# Altium PCB EVAL-AD7124.PcbDoc (part 2 of 2)
Units mil, origin at the board's own origin, x right, y up, seen from the top; angles counter-clockwise.
Board outline 2362.21 x 1574.8 mil, 4 copper layers (Top Layer, GND Layer, PWR Layer, Bottom Layer), stack 30.635 mil thick; 93 components, 57 nets, 234 pads, 171 vias.
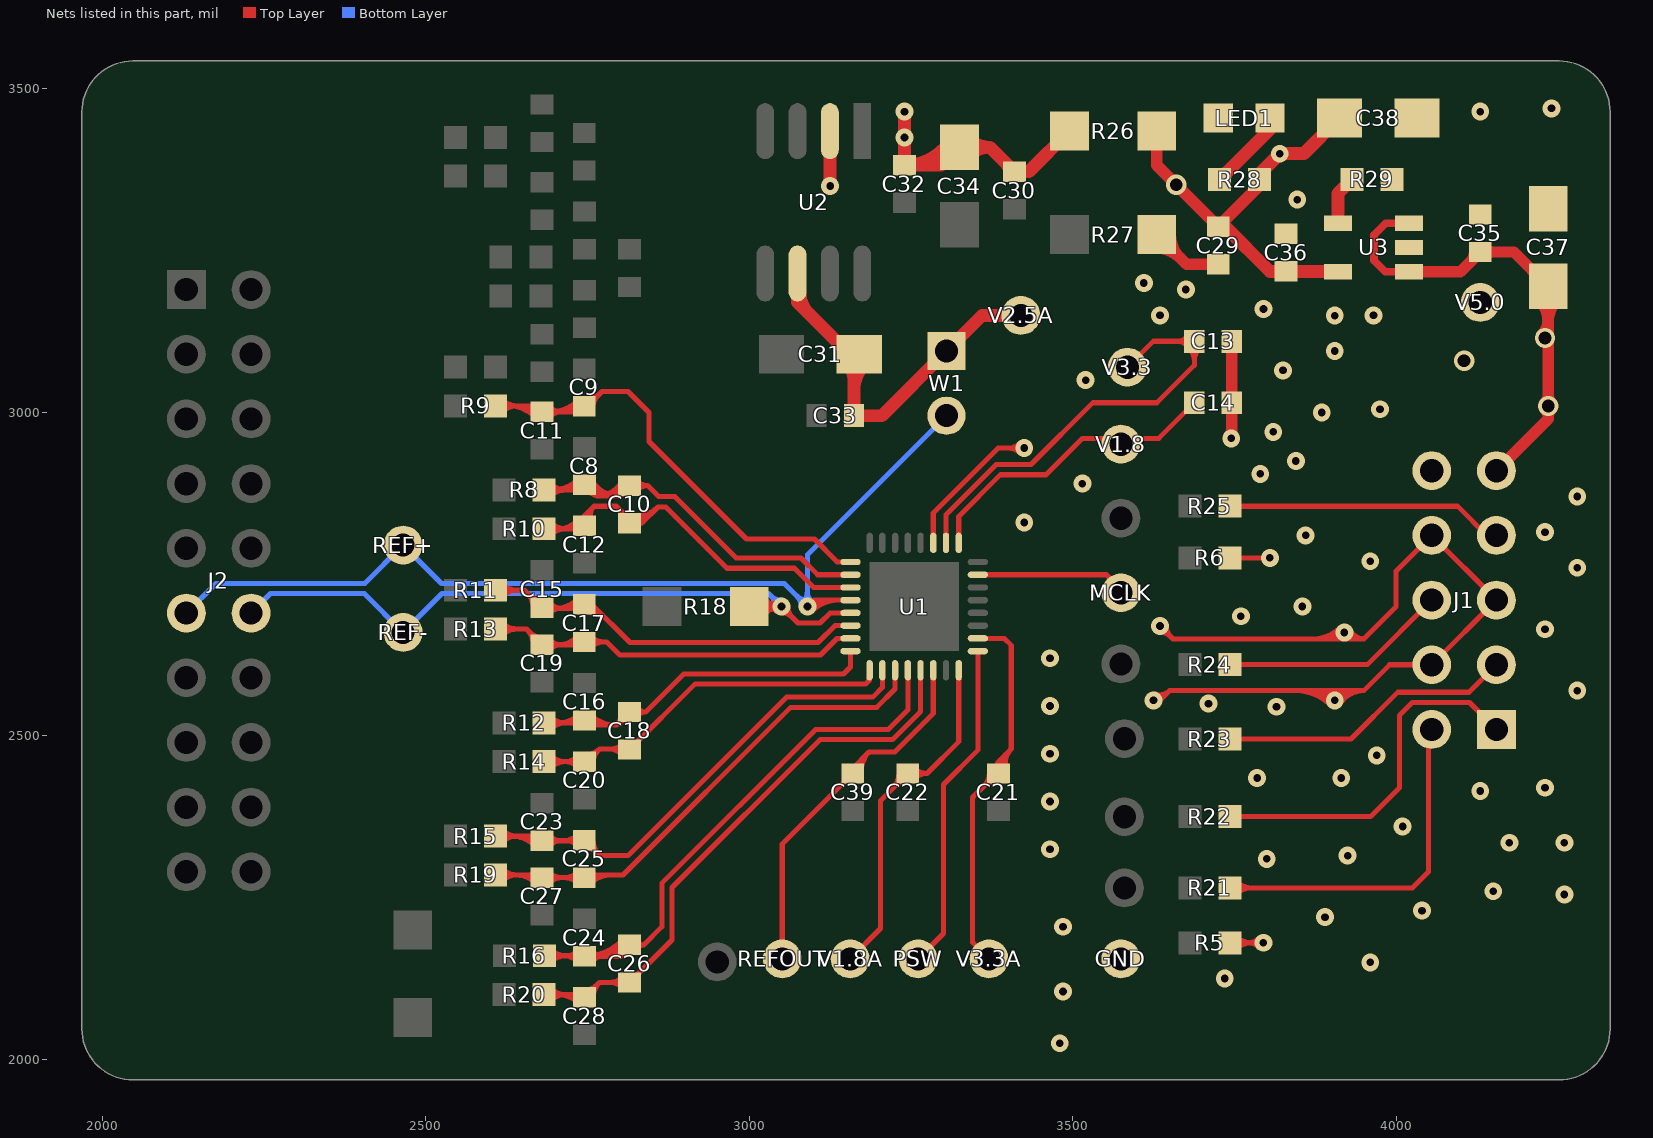
[diagram p4: the nets of this part, all layers, seen from the top]

## Via types
v1: diameter 27.56, hole 11.81, Top Layer to Bottom Layer, 158 vias
v2: diameter 19.68, hole 7.87, Top Layer to Bottom Layer, 9 vias
v3: diameter 31.5, hole 19.68, Top Layer to Bottom Layer, 4 vias

## Nets (pads, with @x,y where several pads share a name; then routed paths per layer and width w, separated by ;. In a path a pad name is that pad's centre, name@x,y a point inside that pad or via, vN(x,y) a via of type N, cw(c..) or ccw(c..) an arc to the next point about the centre after c; other vN are vias at no path point) (continued)
AIN5: C9.1 C11.1 R9.1 U1.9 | length 1015.1
  Top Layer w7.87: R9.1@2608.65,3010.24 2670.76,3010.24 C11.1@2680,3001 2732,3001 2740,3009 2749,3009 2772.5,3032.5 2812.5,3032.5 2845,3000 2845,2955 2995.75,2804.25 3100.75,2804.25 3136.1,2768.9 U1.9@3156.57,2768.9 ; R9.1@2617.74,3000.49 cw(c2641.27,2976.97) 2641.27,3010.24 cw(c2641.27,3043.5) R9.1@2617.74,3019.98 ; 2627.22,3010.24 cw(c2627.22,2950.19) C11.1@2669.68,2992.65 ; 2646.23,3010.24 cw(c2646.23,2969.2) C11.1@2675.25,2998.22 ; C11.1@2665.24,3010.24 cw(c2665.24,2988.21) C11.1@2680.82,3003.78 ; C11.1@2690.32,2992.65 cw(c2710.48,2972.49) 2710.48,3001 cw(c2710.48,3029.51) C11.1@2690.32,3009.35 ; C11.1@2693.67,3001 ccw(c2693.67,3059) C9.1@2734.68,3017.99 ; 2712.68,3001 ccw(c2712.68,3039.99) C9.1@2740.25,3012.42 ; C9.1@2746.97,3021.45 ccw(c2746.97,3056.4) 2771.68,3031.68 ; C9.1@2758.78,3009.64 cw(c2780.85,3009.64) 2765.24,3025.24
AIN6: C8.2 C10.2 R8.1 U1.10 | length 1011.3
  Top Layer w7.87: R8.1@2683,2880.24 2732.24,2880.24 2740,2888 2747.75,2888 2765,2870.75 ; R8.1@2692.74,2870.49 cw(c2716.27,2846.97) 2716.27,2880.24 cw(c2716.27,2913.5) R8.1@2692.74,2889.98 ; R8.1@2695.81,2880.24 ccw(c2695.81,2935.88) C8.2@2735.15,2896.53 ; 2714.82,2880.24 ccw(c2714.82,2916.87) C8.2@2740.72,2890.97 ; C8.2@2744.05,2886.18 ccw(c2771.12,2902.2) 2771.12,2870.75 ; C8.2@2748.75,2876.44 cw(c2750.95,2856.7) 2765,2870.75 ; C8.2@2750.83,2890.19 ccw(c2784.93,2910.39) 2784.93,2870.75 ; C8.2@2757.6,2894.2 ccw(c2798.75,2918.57) 2798.75,2870.75 ; C8.2@2759.19,2887.01 ccw(c2779.26,2885.01) 2765,2870.75 ; 2778.48,2870.75 ccw(c2778.48,2906.47) C10.2@2809.6,2888.93 ; 2791.95,2870.75 ccw(c2791.95,2898.88) C10.2@2816.46,2885.07 ; C10.2@2801.79,2883.37 cw(c2789.95,2879.55) 2798.75,2870.75 ; C10.2@2802.74,2892.8 cw(c2765,2914.07) 2765,2870.75 ; C10.2@2811.69,2875.27 ccw(c2809.9,2859.6) 2798.75,2870.75 ; C10.2@2825.86,2879.22 cw(c2843,2864.22) 2843,2887 ; C10.2@2825.86,2894.78 ccw(c2843,2909.78) 2843,2887 ; U1.10@3156.57,2749.21 3105.79,2749.21 3080,2775 2980,2775 2885,2870 2860,2870 2843,2887 ; 2765,2870.75 2798.75,2870.75 ; 2798.75,2870.75 C10.2@2815,2887 2843,2887
AIN7: C10.1 C12.1 R10.1 U1.11 | length 924
  Top Layer w7.87: R10.1@2683,2820.24 2739.24,2820.24 2740,2821 2740,2835 2760,2855 ; R10.1@2692.74,2810.49 cw(c2716.27,2786.97) 2716.27,2820.24 cw(c2716.27,2853.5) R10.1@2692.74,2829.98 ; 2704.15,2820.24 ccw(c2704.15,2864.08) C12.1@2735.15,2833.08 ; 2723.16,2820.24 ccw(c2723.16,2845.07) C12.1@2740.72,2827.51 ; 2725.83,2820.24 cw(c2725.83,2807.05) C12.1@2735.15,2816.38 ; C12.1@2744.12,2822.61 cw(c2756.66,2830.62) 2746.14,2841.14 ; C12.1@2750.76,2826.85 cw(c2765.12,2836.02) 2753.07,2848.07 ; C12.1@2757.39,2831.08 cw(c2773.58,2841.42) 2760,2855 ; C10.1@2801.55,2831.76 ccw(c2777.54,2837.54) 2795,2855 ; 2804.94,2845.06 cw(c2793.56,2833.68) C10.1@2809.2,2829.92 ; C10.1@2806.47,2843.53 ccw(c2813.03,2850.09) C10.1@2813.03,2840.81 ; C10.1@2816.38,2825.11 ccw(c2819.95,2848.7) 2836.83,2831.83 ; C10.1@2817.56,2832.89 ccw(c2822.85,2867.84) 2847.84,2842.84 ; C10.1@2818.74,2840.68 ccw(c2825.75,2886.97) 2858.86,2853.86 ; C10.1@2828.03,2824.86 cw(c2834,2822.63) 2834,2829 ; C10.1@2828.03,2833.14 ccw(c2834,2835.37) 2834,2829 ; U1.11@3156.57,2729.53 3099.72,2729.53 3070,2759.25 2965.75,2759.25 2871.14,2853.86 2858.86,2853.86 ; 2760,2855 2795,2855 ; 2795,2855 2811,2839 2811,2829 C10.1@2815,2829 2834,2829 ; 2834,2829 2858.86,2853.86
AIN8: C15.2 C17.2 R11.1 U1.14 | length 869.6
  Top Layer w7.87: R11.1@2608,2725.24 2652.76,2725.24 C15.2@2680,2698 2681,2697 C17.2@2739.53,2697 ; R11.1@2617.74,2715.49 cw(c2641.27,2691.97) 2641.27,2725.24 cw(c2641.27,2758.5) R11.1@2617.74,2734.98 ; 2656.48,2721.52 cw(c2632.95,2698) C15.2@2666.22,2698 ; 2661.23,2716.77 ccw(c2678.03,2733.57) C15.2@2678.03,2709.81 ; C15.2@2690.32,2689.65 cw(c2708.07,2671.9) 2708.07,2697 ; C15.2@2690.32,2706.35 ccw(c2712.9,2728.93) 2712.9,2697 ; 2699.37,2697 ccw(c2699.37,2746.93) C17.2@2734.68,2711.62 ; 2718.38,2697 ccw(c2718.38,2727.92) C17.2@2740.25,2706.06 ; C17.2@2739.73,2698 C17.2@2745,2703.27 2756.73,2703.27 2815.58,2644.42 3106.36,2644.42 3132.41,2670.47 U1.14@3156.57,2670.47 ; C17.2@2746.97,2691.46 cw(c2746.97,2639.39) 2783.79,2676.21 ; C17.2@2746.97,2699.34 cw(c2746.97,2666.27) 2770.35,2689.65
AIN9: C17.1 C19.1 R13.1 U1.15 | length 829.8
  Top Layer w7.87: R13.1@2608,2665.24 2655.76,2665.24 C19.1@2680,2641 2740.73,2641 C17.1@2745,2645.27 2779.73,2645.27 2800,2625 3110,2625 3135.79,2650.79 U1.15@3156.57,2650.79 ; R13.1@2617.74,2655.49 cw(c2641.27,2631.97) 2641.27,2665.24 cw(c2641.27,2698.5) R13.1@2617.74,2674.98 ; 2656.48,2664.52 cw(c2632.95,2641) C19.1@2666.22,2641 ; 2661.23,2659.77 ccw(c2678.03,2676.57) C19.1@2678.03,2652.81 ; C19.1@2690.32,2632.65 cw(c2710.48,2612.49) 2710.48,2641 cw(c2710.48,2669.51) C19.1@2690.32,2649.35 ; 2704.2,2641 ccw(c2704.2,2684.1) C17.1@2734.68,2653.62 ; 2723.21,2641 ccw(c2723.21,2665.09) C17.1@2740.25,2648.06 ; 2724.83,2641 cw(c2724.83,2627.07) C17.1@2734.68,2636.92 ; C17.1@2755.32,2636.92 cw(c2775.48,2616.76) 2775.48,2645.27 cw(c2775.48,2673.79) C17.1@2755.32,2653.62
AIN10: C16.2 C18.2 R12.1 U1.16 | length 790.7
  Top Layer w7.87: R12.1@2683,2520.24 2732.76,2520.24 2740,2513 2744,2517 2795,2517 ; R12.1@2692.74,2510.49 cw(c2716.27,2486.97) 2716.27,2520.24 cw(c2716.27,2553.5) R12.1@2692.74,2529.98 ; 2706.34,2520.24 ccw(c2706.34,2560.98) C16.2@2735.15,2532.17 ; 2723.63,2520.24 cw(c2723.63,2503.95) C16.2@2735.15,2515.47 ; 2725.35,2520.24 ccw(c2725.35,2541.97) C16.2@2740.72,2526.6 ; C16.2@2750.22,2526.6 ccw(c2773.4,2549.78) 2773.4,2517 ; C16.2@2755.79,2532.17 ccw(c2792.41,2568.79) 2792.41,2517 ; 2796.23,2518.23 cw(c2813.03,2501.43) C18.2@2813.03,2525.19 ; C18.2@2801.32,2535.5 cw(c2779.32,2532.68) 2795,2517 ; C18.2@2826.56,2530.11 cw(c2840,2520.45) 2840,2537 ; C18.2@2826.56,2543.89 ccw(c2840,2553.55) 2840,2537 ; U1.16@3156.57,2631.1 3156.57,2606.57 3145.75,2595.75 2898.75,2595.75 2840,2537 ; 2795,2517 C18.2@2815,2537 2840,2537
AIN11: C18.1 C20.1 R14.1 U1.17 | length 773.4
  Top Layer w7.87: R14.1@2683,2460.24 2730.76,2460.24 2740,2451 2769,2480 ; R14.1@2692.74,2450.49 cw(c2716.27,2426.97) 2716.27,2460.24 cw(c2716.27,2493.5) R14.1@2692.74,2469.98 ; 2714.68,2460.24 ccw(c2714.68,2489.19) C20.1@2735.15,2468.72 ; 2715.29,2460.24 cw(c2715.29,2432.16) C20.1@2735.15,2452.01 ; C20.1@2748.19,2472.15 ccw(c2749.92,2499.08) 2769,2480 ; C20.1@2759.25,2460.36 cw(c2783.12,2460.36) 2766.24,2477.24 ; 2782.1,2480 cw(c2782.1,2448.07) C18.1@2804.68,2470.65 ; 2786.93,2480 ccw(c2786.93,2505.1) C18.1@2804.68,2487.35 ; 3181.14,2581.14 ccw(c3171.53,2590.75) U1.17@3185.12,2590.75 ; U1.17@3186.1,2601.57 3186.1,2586.1 3180,2580 2916,2580 C18.1@2815,2479 2814,2480 2769,2480
AIN12: C23.2 C25.2 R15.1 U1.18 | length 995.6
  Top Layer w7.87: R15.1@2613,2345.24 2672.76,2345.24 C23.2@2680,2338 2744.09,2338 C25.2@2745,2338.91 2768.91,2315 2812.73,2315 3057.73,2560 3190.79,2560 3205.79,2575 U1.18@3205.79,2601.57 ; R15.1@2617.74,2335.49 cw(c2641.27,2311.97) 2641.27,2345.24 cw(c2641.27,2378.5) R15.1@2617.74,2354.98 ; 2632.05,2345.24 cw(c2632.05,2292.02) C23.2@2669.68,2329.65 ; 2651.06,2345.24 cw(c2651.06,2311.03) C23.2@2675.25,2335.22 ; C23.2@2690.32,2329.65 cw(c2710.48,2309.49) 2710.48,2338 cw(c2710.48,2366.51) C23.2@2690.32,2346.35 ; 2712.32,2338 ccw(c2712.32,2369.62) C25.2@2734.68,2347.26 ; 2716.71,2338 cw(c2716.71,2312.59) C25.2@2734.68,2330.56 ; C25.2@2746.97,2327.1 cw(c2746.97,2303.34) 2763.77,2320.14 ; C25.2@2758.78,2338.91 ccw(c2792.05,2338.91) 2768.52,2315.39
AIN13: C25.1 C27.1 R19.1 U1.19 | length 1042.7
  Top Layer w7.87: R19.1@2613,2285.24 2675.76,2285.24 C27.1@2680,2281 2727.53,2281 2739.53,2269 2755.53,2285 2805,2285 3064.25,2544.25 3197.31,2544.25 3225.47,2572.41 U1.19@3225.47,2601.57 ; R19.1@2617.74,2275.49 cw(c2641.27,2251.97) 2641.27,2285.24 cw(c2641.27,2318.5) R19.1@2617.74,2294.98 ; 2639.29,2285.24 cw(c2639.29,2242.26) C27.1@2669.68,2272.65 ; 2658.3,2285.24 cw(c2658.3,2261.27) C27.1@2675.25,2278.22 ; 2659.74,2285.24 ccw(c2659.74,2299.29) C27.1@2669.68,2289.35 ; C27.1@2690.32,2272.65 cw(c2710.48,2252.49) 2710.48,2281 cw(c2710.48,2309.51) C27.1@2690.32,2289.35 ; 2714.3,2281 cw(c2714.3,2252.18) C25.1@2734.68,2272.56 ; 2714.74,2281 ccw(c2714.74,2309.2) C25.1@2734.68,2289.26 ; C25.1@2749.75,2278.13 cw(c2766.35,2261.53) 2766.35,2285 ; C25.1@2755.32,2272.56 cw(c2785.36,2242.52) 2785.36,2285 ; C25.1@2755.32,2289.26 ccw(c2765.61,2299.55) 2765.61,2285
AIN14: C24.2 C26.2 R16.1 U1.20 | length 1199.4
  Top Layer w7.87: R16.1@2683.65,2160.24 2744.69,2160.24 C24.2@2745.47,2159.45 ; R16.1@2693.39,2150.49 cw(c2716.91,2126.97) 2716.91,2160.24 cw(c2716.91,2193.5) R16.1@2693.39,2169.98 ; 2713.1,2160.24 cw(c2713.1,2129.05) C24.2@2735.15,2151.1 ; 2716.87,2160.24 ccw(c2716.87,2186.08) C24.2@2735.15,2167.81 ; C24.2@2755.79,2151.1 cw(c2775.95,2130.94) 2775.95,2159.45 cw(c2775.95,2187.97) C24.2@2755.79,2167.81 ; 2763.59,2159.45 ccw(c2763.59,2223.14) C26.2@2810.15,2179.69 ; 2781.71,2159.45 ccw(c2781.71,2206.23) C26.2@2815.91,2174.31 ; 2799.83,2159.45 ccw(c2799.83,2189.32) C26.2@2821.67,2168.94 ; C26.2@2801.56,2174.18 cw(c2786.45,2170.46) 2797.46,2159.46 ; C26.2@2804.4,2185.06 cw(c2745.47,2240.06) C24.2@2745.47,2159.45 ; C26.2@2812.42,2165.2 ccw(c2811.4,2145.51) 2797.46,2159.46 ; C26.2@2827.3,2171.28 cw(c2837,2165.92) 2837,2177 ; C26.2@2827.3,2182.72 ccw(c2837,2188.08) 2837,2177 ; U1.20@3245.16,2601.57 3245.16,2540.16 3215,2510 3102.73,2510 2865,2272.27 2865,2205 2837,2177 ; C24.2@2745.47,2159.45 2797.45,2159.45 ; 2797.45,2159.45 C26.2@2815,2177 2837,2177
AIN15: C26.1 C28.1 R20.1 U1.21 | length 1082.5
  Top Layer w7.87: R20.1@2683,2100.24 2741.23,2100.24 C28.1@2745.47,2096 2768.47,2119 ; R20.1@2692.74,2090.49 cw(c2716.27,2066.97) 2716.27,2100.24 cw(c2716.27,2133.5) R20.1@2692.74,2109.98 ; 2704.76,2100.24 cw(c2704.76,2057.26) C28.1@2735.15,2087.65 ; 2723.77,2100.24 cw(c2723.77,2076.27) C28.1@2740.72,2093.22 ; 2725.21,2100.24 ccw(c2725.21,2114.29) C28.1@2735.15,2104.35 ; C28.1@2747.44,2107.81 ccw(c2747.44,2131.57) 2764.24,2114.77 ; C28.1@2759.25,2096.2 cw(c2790.74,2096.73) 2768.47,2119 ; C26.1@2804.68,2110.65 ccw(c2784.52,2090.49) 2784.52,2119 ccw(c2784.52,2147.51) C26.1@2804.68,2127.35 ; U1.21@3264.84,2601.57 3264.84,2537.57 3221.52,2494.25 3109.25,2494.25 2880.75,2265.75 2880.75,2184.75 C26.1@2815,2119 2768.47,2119
GND: C13.1 C14.1 C29.1 C35.1 C36.1 C37.1 C38.1 GND.1 J1.4 J1.5 J1.8 LED1.2 R27.2 R29.1 U1.3 U3.2 | length 2472.2
  Top Layer w7.87: U1.3@3284.53,2798.43 3284.53,2844.53 3385,2945 v1(3425,2945) ; v1@3418.04,2938.04 ccw(c3401.24,2921.24) 3401.24,2945 ccw(c3401.24,2968.76) v1@3418.04,2951.96 ; v1(3625,2555) 3635,2555 3650,2570 ; v1@3625.57,2556.88 ccw(c3629.95,2571.43) 3640.69,2560.69 ; v1@3627.84,2564.42 ccw(c3634.26,2585.74) 3650,2570 ; v1@3635,2660.16 cw(c3635,2636.4) 3651.8,2653.2 cw(c3668.6,2670) v1@3644.84,2670 ; v1(3635,2670) 3655,2650 3950,2650 ; 3845.02,2570 cw(c3845.02,2495.02) v1@3898.04,2548.04 ; 3864.03,2570 cw(c3864.03,2514.03) v1@3903.61,2553.61 ; 3872.1,2650 ccw(c3872.1,2707.9) v1@3913.04,2666.96 ; 3883.04,2570 cw(c3883.04,2533.04) v1@3909.18,2559.18 ; 3891.11,2650 ccw(c3891.11,2688.89) v1@3918.61,2661.39 ; 3893.34,2562.34 cw(c3907.21,2553.61) 3907.21,2570 ; v1@3900,2558.15 cw(c3921.47,2544.63) 3921.47,2570 ; 3902.05,2570 cw(c3902.05,2552.05) v1@3914.74,2564.74 ; v1@3906.67,2553.95 cw(c3935.74,2535.65) 3935.74,2570 ; 3910.11,2650 ccw(c3910.11,2669.89) v1@3924.18,2655.82 ; v1@3913.33,2549.76 cw(c3950,2526.67) 3950,2570 ; v1@3921.81,2660.77 ccw(c3938.09,2667.69) 3938.09,2650 ; v1@3929.06,2663.85 ccw(c3950,2672.76) 3950,2650 ; 3650,2570 3950,2570 ; 3950,2570 3990,2610 J1.4@4055,2610 J1.5@4155,2710 J1.8@4055,2810 4000,2755 4000,2700 3950,2650
  Top Layer w17.72: R27.2@3630,3253.86 cw(c3630,3202.82) 3666.09,3238.91 cw(c3702.18,3275) R27.2@3651.14,3275 ; R27.2@3630,3275 3676,3229 C29.1@3725,3229 ; C29.1@3718.16,3224.13 ccw(c3706.4,3212.37) 3706.4,3229 ccw(c3706.4,3245.63) C29.1@3718.16,3233.87 ; C14.1@3741.13,3008.16 cw(c3729.37,2996.4) 3746,2996.4 cw(c3762.63,2996.4) C14.1@3750.87,3008.16 ; C14.1@3741.13,3021.84 ccw(c3729.37,3033.6) 3746,3033.6 ccw(c3762.63,3033.6) C14.1@3750.87,3021.84 ; C13.1@3741.13,3103.16 cw(c3729.37,3091.4) 3746,3091.4 cw(c3762.63,3091.4) C13.1@3750.87,3103.16 ; v1@3741.52,2963.48 ccw(c3730.7,2974.3) 3746,2974.3 ; v1(3745,2960) 3746,2961 C14.1@3746,3015 C13.1@3746,3110
  other v1: 3480,2025 3485,2105 3735,2125 3960,2150 3485,2205 3890,2220 4040,2230 4260,2255 4150,2260 3800,2310 3925,2315 3465,2325 4175,2335 4260,2335 4010,2360 3465,2398.75 4130,2415 4230,2420 3785,2435 3915,2435 3970,2470 3465,2472.5 3815,2545 3465,2546.25 3710,2550 3905,2555 4280,2570 3465,2620 3920,2660 4230,2665 3760,2685 3855,2700 4280,2760 3960,2770 3860,2810 4230,2815 3425,2830 4280,2870 3515,2890 3790,2905 3845,2925 3810,2970 3885,3000 3975,3005 3520,3050 3825,3065 3905,3095 3635,3150 3905,3149.75 3965,3150 3795,3160 3675,3190 3610,3200 3847.18,3329 4130,3465 4240,3470
MCLK: MCLK.1 U1.31 | length 238.1
  Top Layer w7.87: U1.31@3353.43,2749.21 3552.07,2749.21 MCLK.1@3580,2721.28
NetLED1_1: LED1.1 R28.1 | length 157.4
  Top Layer w7.87: LED1.1@3805,3437.76 LED1.1@3805,3455
  Top Layer w19.68: R28.1@3727,3359.76 LED1.1@3805,3437.76 ; R28.1@3727,3367.64 ccw(c3727,3386.65) 3740.44,3373.21 ccw(c3753.88,3359.76) R28.1@3734.87,3359.76
NetR29_2: R29.2 U3.4 | length 76.8
  Top Layer w20: U3.4@3909.88,3292.4 3909.88,3338.51 R29.2@3931.61,3360.24
PSW: PSW.1 U1.25 | length 514
  Top Layer w7.87: PSW.1@3261.02,2155.38 3300.38,2194.73 3300.38,2425 3353.43,2478.05 U1.25@3353.43,2631.1
REFIN1+: J2.11 REF+.1 U1.12 W1.2 | length 1659.5
  Top Layer w7.87: v1(3090,2700) 3099.84,2709.84 ; v1@3091.39,2698.61 cw(c3118.51,2671.49) 3118.51,2709.84 ; v1@3094.24,2708.88 ccw(c3096.36,2713.32) 3099.84,2709.84 ; v1@3096.96,2693.04 cw(c3137.52,2652.48) 3137.52,2709.84 ; v1@3098.88,2704.24 cw(c3103.32,2706.36) 3099.84,2709.84 ; U1.12@3156.57,2709.84 3099.84,2709.84
  Bottom Layer w7.87: J2.11@2130,2690 2175.75,2735.75 2405.75,2735.75 REF+.1@2465,2795 2524.25,2735.75 3054.25,2735.75 v1(3090,2700) 3090,2780 W1.2@3305,2995 ; v1@3080.16,2700 ccw(c3056.4,2700) 3073.2,2716.8 ccw(c3090,2733.6) v1@3090,2709.84 ; v1@3083.04,2706.96 ccw(c3066.24,2723.76) 3090,2723.76 ccw(c3113.76,2723.76) v1@3096.96,2706.96
REFIN1-: J2.12 R18.2 REF-.1 U1.13 | length 1336.7
  Top Layer w7.87: R18.2@3000,2700 v1(3050,2700) ; R18.2@3014.91,2689.58 cw(c3034.89,2675.63) 3034.89,2700 cw(c3034.89,2724.37) R18.2@3014.91,2710.42 ; R18.2@3021.37,2685.08 cw(c3050,2665.08) v1(3050,2700) ; R18.2@3021.37,2714.92 ccw(c3050,2734.92) v1(3050,2700) ; v1@3040.63,2696.98 ccw(c3029.51,2693.39) 3032.54,2704.68 ccw(c3035.56,2715.96) v1@3043.4,2707.3 ; v1@3040.63,2703.02 cw(c3029.51,2706.61) 3032.54,2695.32 cw(c3035.56,2684.04) v1@3043.4,2692.7 ; v1@3043.04,2693.04 ccw(c3026.24,2676.24) 3026.24,2700 ccw(c3026.24,2723.76) v1@3043.04,2706.96 ; v1@3050,2690.16 cw(c3050,2666.4) 3066.8,2683.2 cw(c3083.6,2700) v1@3059.84,2700 ; U1.13@3156.57,2690.16 3125.16,2690.16 3109.41,2674.41 3075.59,2674.41 v1(3050,2700)
  Bottom Layer w7.87: J2.12@2230,2690 2260,2720 2405,2720 REF-.1@2465,2660 2525,2720 3030,2720 v1(3050,2700) ; v1@3040.16,2700 ccw(c3016.4,2700) 3033.2,2716.8 ccw(c3050,2733.6) v1@3050,2709.84
REFOUT: C39.2 REFOUT.1 U1.22 | length 624.1
  Top Layer w7.87: REFOUT.1@3051.02,2155.38 3051.02,2333.02 C39.2@3160,2442 3160,2450 3185,2475 ; C39.2@3165.88,2442.41 cw(c3191.54,2445.06) 3173.3,2463.3 ; C39.2@3173.72,2443.22 cw(c3212.74,2447.26) 3185,2475 ; U1.22@3284.53,2601.57 3284.53,2534.53 3225,2475 3185,2475
SPI_CS: J1.7 R25.1 | length 430.7
  Top Layer w7.87: R25.1@3743,2855.24 3743.24,2855 4095,2855 4140,2810 J1.7@4155,2810
SPI_MISO: J1.1 R22.1 | length 568
  Top Layer w7.87: R22.1@3743,2375.24 3960.24,2375.24 4005,2420 4005,2531.81 4025,2551.81 4113.19,2551.81 J1.1@4155,2510
SPI_MOSI: J1.3 R23.1 | length 470.3
  Top Layer w7.87: R23.1@3743,2495.24 3930.24,2495.24 4002.56,2567.56 4112.56,2567.56 J1.3@4155,2610 J1.3@4144.25,2610
SPI_SCK: J1.6 R24.1 | length 353.3
  Top Layer w7.87: R24.1@3743,2610.24 3955.24,2610.24 J1.6@4055,2710
SYNC: J1.2 R21.1 | length 584.5
  Top Layer w7.87: R21.1@3743,2265.24 4025.24,2265.24 4050,2290 J1.2@4050,2505 ; R21.1@3752.74,2255.49 cw(c3776.27,2231.97) 3776.27,2265.24 cw(c3776.27,2298.5) R21.1@3752.74,2274.98
V1.8: C14.2 U1.1 V1.8.1 | length 477.8
  Top Layer w7.87: U1.1@3323.9,2798.43 3323.9,2839.36 3388.2,2903.66 3458.66,2903.66 3515,2960 3633,2960 C14.2@3688,3015
V1.8A: C22.2 U1.24 V1.8A.1 | length 620.9
  Top Layer w7.87: V1.8A.1@3156.02,2155.38 3203,2202.35 3203,2400 C22.2@3245,2442 3274.73,2442 ; 3221.48,2418.48 ccw(c3197.95,2442) C22.2@3231.22,2442 ; 3226.23,2423.23 cw(c3243.03,2406.43) C22.2@3243.03,2430.19 ; C22.2@3255.48,2433.81 cw(c3274.73,2415.29) 3274.73,2442 ; C22.2@3255.48,2450.19 ccw(c3274.73,2468.71) 3274.73,2442 ; U1.24@3323.9,2601.57 3323.9,2491.17 3274.73,2442
V2.5A: C31.2 C33.2 U2.6 V2.5A.1 W1.1 | length 705.8
  Top Layer w19.68: U2.6@3074.72,3214.76 3074.72,3170.28 3155,3090 C31.2@3170,3090 3162,3082 C33.2@3162,2995 3205,2995 W1.1@3305,3095 3360,3150 V2.5A.1@3420,3150 ; U2.6@3078.66,3185.24 ccw(c3124.28,3185.24) 3092.02,3152.98 ; C31.2@3150.75,3075.75 cw(c3123.58,3048.58) 3162,3048.58 ; 3162,3034.09 cw(c3220.91,3034.09) C31.2@3179.25,3075.75
V3.3: C13.2 C29.2 C36.2 C38.2 J1.10 R5.1 R6.1 R26.2 R28.2 U1.2 U3.5 V3.3.1 | length 1632.9
  Top Layer w7.87: U1.2@3304.21,2798.43 3304.21,2841.94 3381.68,2919.41 3435.6,2919.41 3531.19,3015 3630,3015 3688,3073 C13.2@3688,3110 3624.62,3110 V3.3.1@3584.62,3070 ; C13.2@3679.65,3099.68 cw(c3659.49,3079.52) 3688,3079.52 cw(c3716.51,3079.52) C13.2@3696.35,3099.68 ; C13.2@3679.65,3101.65 ccw(c3659.49,3081.49) 3659.49,3110 ccw(c3659.49,3138.51) C13.2@3679.65,3118.35 ; R5.1@3743,2180.24 v1(3794.76,2180.24) v1@3795,2180 ; R6.1@3743,2775.24 v1(3804.76,2775.24) v1@3805,2775 ; R5.1@3752.74,2170.49 cw(c3776.27,2146.97) 3776.27,2180.24 cw(c3776.27,2213.5) R5.1@3752.74,2189.98 ; v1@3787.8,2173.28 ccw(c3771,2156.47) 3771,2180.24 ccw(c3771,2204) v1@3787.8,2187.2
  Top Layer w17.72: R26.2@3630,3435 3630,3382 v3(3660,3352) C29.2@3725,3287 3789,3351 R28.2@3789,3359.76
  Top Layer w20: C29.2@3733.86,3287 3736.01,3287 3805.01,3218 C36.2@3830,3218 3830.4,3217.6 U3.5@3909.88,3217.6 ; R28.2@3789,3359.76 3789,3369 v1(3820,3400) 3857.3,3400 C38.2@3912.3,3455
V3.3A: C21.2 C30.2 C32.2 C34.2 R26.1 U1.26 U2.2 V3.3A.1 | length 1428.9
  Top Layer w7.87: U1.26@3353.43,2650.79 3394.21,2650.79 3405,2640 3405,2480 ; 3361.11,2421.11 cw(c3383.03,2399.18) C21.2@3383.03,2430.19 ; 3363.6,2423.6 ccw(c3345.2,2442) C21.2@3371.22,2442 ; V3.3A.1@3370.63,2155.38 3345,2181.01 3345,2405 3382,2442 C21.2@3385,2442 3385,2460 ; C21.2@3380.3,2452.84 ccw(c3377.19,2460) 3385,2460 ; C21.2@3383.3,2440.56 cw(c3402.77,2448.2) 3387.99,2462.99 ; C21.2@3389.7,2452.84 cw(c3392.81,2460) 3385,2460 ; C21.2@3390.63,2443.44 cw(c3415,2452.99) 3396.49,2471.49 ; C21.2@3397.96,2446.31 cw(c3427.22,2457.78) 3405,2480 ; 3385,2460 3405,2480
  Top Layer w19.68: U2.2@3124.72,3434.76 3124.72,3350.28 v1(3125,3350) ; v1(3240,3465) C32.2@3240,3382 ; 3278.77,3382 ccw(c3278.77,3438.79) C34.2@3324.62,3405.28 ; C34.2@3308.73,3416.89 cw(c3240,3467.12) C32.2@3240,3382 ; C34.2@3339.6,3396.11 cw(c3372,3365.29) 3372,3410 ; C34.2@3339.6,3423.89 ccw(c3372,3454.71) 3372,3410 ; C30.2@3396.56,3385.44 cw(c3383.12,3372) C30.2@3402.13,3372 ; R26.1@3495,3435 3432,3372 C30.2@3410,3372 3372,3410 ; C32.2@3240,3382 3297,3382 C34.2@3325,3410 3372,3410
  other v1: 3240,3425
V5.0: C35.2 C37.2 J1.9 U3.1 U3.3 V5.0.1 | length 929
  Top Layer w12: U3.1@4020.12,3217.6 3982.99,3217.6 3965.58,3235 3965.58,3274.17 3983.82,3292.4 U3.3@4020.12,3292.4
  Top Layer w17.72: U3.1@4023.66,3217.2 4099.2,3217.2 C35.2@4130,3248 4182,3248 C37.2@4235,3195 v3(4235,3010) 4235,2990 J1.9@4155,2910 ; C35.2@4114.88,3232.88 ccw(c4099.76,3248) C35.2@4121.14,3248 ; C35.2@4136.84,3243.13 cw(c4148.6,3231.37) 4148.6,3248 cw(c4148.6,3264.63) C35.2@4136.84,3252.87 ; C37.2@4220.05,3175.05 cw(c4183.96,3138.96) 4235,3138.96 cw(c4286.04,3138.96) C37.2@4249.95,3175.05 ; v3@4225.13,3119.87 ccw(c4201.3,3143.7) 4235,3143.7 ; v3@4230.13,3005.13 cw(c4218.37,2993.37) 4235,2993.37 cw(c4251.63,2993.37) v3@4239.87,3005.13 ; v3@4230.13,3014.87 ccw(c4218.37,3026.63) 4235,3026.63 ccw(c4251.63,3026.63) v3@4239.87,3014.87
  other v3: 4105,3080 4230,3115
pads on no net: U2.1 U2.3 U2.5 U2.7 U2.8

## Polygon pours and split planes (outlines as drawn)
AGND on Bottom Layer "Bottom Layer-No Net" (solid, remove dead copper, pour order 8): 1968.5,3543.31 3540,3543.31 3540,3150 3355,2965 3355,2695 3350,2690 3415,2625 3415,2620 3415,1968.5 1968.5,1968.5 1968.5,3540
GND on Bottom Layer "Bottom Layer-No Net" (solid, remove dead copper, pour order 2): 3580,3543.31 3580,3140 3580,3135 3395,2950 3390,2945 3390,2705 3390,2700 3450,2640 3455,2635 3455,1950 4345,1950 4360,1965 4345,1980 4345,3545 3595,3545 3590,3550
AGND on Top Layer "Bottom Layer-No Net" (solid, remove dead copper, pour order 6): 3540,3525 3540,3155 3540,3150 3360,2970 3353.43,2963.43 3353.43,2690.16 3353.43,2681.57 3415,2620 3415,1968.5 1968.5,1968.5 1968.5,3543.31 3526.69,3543.31 3540,3530
GND on Top Layer "Bottom Layer-No Net" (solid, remove dead copper, pour order 4): 3580,3543.31 3580,3140 3580,3130 3395,2945 3390,2940 3390,2700 3455,2635 3450,2630 3450,1968.5 4376.5,1968.5 4380,1965 4345,2000 4345,2390 4345,3540 4340,3545
GND on GND Layer (split plane): 4258.54,3522.93 4265.04,3521.83 4271.37,3520 4277.45,3517.48 4283.22,3514.3 4288.59,3510.49 4293.5,3506.1 4297.89,3501.19 4301.7,3495.81 4304.88,3490.05 4307.41,3483.97 4309.23,3477.64 4310.33,3471.14 4310.67,3465.14 4310.61,3464.57 4310.61,2047.24 4310.67,2046.67 4310.33,2040.67 4309.23,2034.17 4307.41,2027.85 4304.88,2021.76 4301.7,2016 4297.89,2010.62 4293.5,2005.71 4288.59,2001.33 4283.22,1997.51 4277.45,1994.33 4271.37,1991.81 4265.04,1989.98 4258.54,1988.88 4252.55,1988.54 4251.97,1988.6 4251.96,1988.6 3454.78,1988.6 3454.78,2630 3454.4,2633.86 3453.27,2637.57 3451.45,2640.99 3448.99,2643.99 3446.24,2646.24 3443.99,2648.99 3394.78,2698.19 3394.78,2946.81 3573.99,3126.01 3576.45,3129.01 3578.27,3132.43 3579.4,3136.14 3579.78,3140 3579.78,3523.21 4251.97,3523.21 4252.55,3523.27
AGND on GND Layer (split plane): 2047.24,3523.21 3540.22,3523.21 3540.22,3148.19 3361.01,2968.99 3358.55,2965.99 3356.73,2962.57 3355.6,2958.86 3355.22,2955 3355.22,2690 3355.6,2686.14 3356.73,2682.43 3358.55,2679.01 3361.01,2676.01 3410.57,2626.46 3410.6,2626.14 3411.73,2622.43 3413.55,2619.01 3415.22,2616.98 3415.22,2525 3415.22,1988.6 2047.24,1988.6 2046.67,1988.54 2040.67,1988.88 2034.17,1989.98 2027.85,1991.81 2021.76,1994.33 2016,1997.51 2010.62,2001.32 2005.71,2005.71 2001.33,2010.62 1997.51,2016 1994.33,2021.76 1991.81,2027.85 1989.98,2034.17 1988.88,2040.67 1988.54,2046.67 1988.6,2047.24 1988.6,2047.25 1988.6,3464.57 1988.54,3465.14 1988.88,3471.14 1989.98,3477.64 1991.81,3483.97 1994.33,3490.05 1997.51,3495.81 2001.32,3501.19 2005.71,3506.1 2010.62,3510.49 2016,3514.3 2021.76,3517.48 2027.85,3520 2034.17,3521.83 2040.67,3522.93 2046.67,3523.27
V5.0 on PWR Layer (split plane): 4310.61,2904.78 4178.19,2904.78 3999.78,3083.19 3999.78,3235.22 4100,3235.22 4103.86,3235.6 4107.57,3236.73 4110.99,3238.55 4113.99,3241.01 4208.19,3335.22 4310.61,3335.22
V3.3 on PWR Layer (split plane): 4258.54,3522.93 4265.04,3521.83 4271.37,3520 4277.45,3517.48 4283.22,3514.3 4288.59,3510.49 4293.5,3506.1 4297.89,3501.19 4301.7,3495.81 4304.88,3490.05 4307.41,3483.97 4309.23,3477.64 4310.33,3471.14 4310.67,3465.14 4310.61,3464.57 4310.61,3374.78 4200,3374.78 4196.14,3374.4 4192.43,3373.27 4189.01,3371.45 4186.01,3368.99 4091.81,3274.78 3980,3274.78 3976.14,3274.4 3972.43,3273.27 3969.01,3271.45 3966.01,3268.99 3963.55,3265.99 3961.73,3262.57 3960.6,3258.86 3960.22,3255 3960.6,3251.14 3960.95,3250 3960.6,3248.86 3960.22,3245 3960.22,3075 3960.6,3071.14 3961.73,3067.43 3963.55,3064.01 3966.01,3061.01 4156.01,2871.01 4159.01,2868.55 4162.43,2866.73 4166.14,2865.6 4170,2865.22 4310.61,2865.22 4310.61,2047.24 4310.67,2046.67 4310.33,2040.67 4309.23,2034.17 4307.41,2027.85 4304.88,2021.76 4301.7,2016 4297.89,2010.62 4293.5,2005.71 4288.59,2001.33 4283.22,1997.51 4277.45,1994.33 4271.37,1991.81 4265.04,1989.98 4258.54,1988.88 4252.55,1988.54 4251.97,1988.6 4251.96,1988.6 3454.78,1988.6 3454.78,2630 3454.4,2633.86 3453.27,2637.57 3451.45,2640.99 3448.99,2643.99 3394.78,2698.19 3394.78,2946.81 3563.54,3115.57 3563.86,3115.6 3567.57,3116.73 3570.99,3118.55 3573.99,3121.01 3576.45,3124.01 3578.27,3127.43 3579.4,3131.14 3579.78,3135 3579.78,3195 3579.78,3523.21 4251.97,3523.21 4252.55,3523.27
V3.3A on PWR Layer (split plane): 2047.24,3523.21 3540.22,3523.21 3540.22,3365 3540.22,3195 3540.22,3175 3540.22,3160 3540.22,3148.19 3361.01,2968.99 3358.55,2965.99 3356.73,2962.57 3355.6,2958.86 3355.22,2955 3355.22,2950 3355.22,2875 3355.22,2690 3355.6,2686.14 3356.73,2682.43 3358.55,2679.01 3361.01,2676.01 3415.22,2621.81 3415.22,2590 3415.22,1988.6 2047.24,1988.6 2046.67,1988.54 2040.67,1988.88 2034.17,1989.98 2027.85,1991.81 2021.76,1994.33 2016,1997.51 2010.62,2001.32 2005.71,2005.71 2001.33,2010.62 1997.51,2016 1994.33,2021.76 1991.81,2027.85 1989.98,2034.17 1988.88,2040.67 1988.54,2046.67 1988.6,2047.24 1988.6,2047.25 1988.6,3464.57 1988.54,3465.14 1988.88,3471.14 1989.98,3477.64 1991.81,3483.97 1994.33,3490.05 1997.51,3495.81 2001.32,3501.19 2005.71,3506.1 2010.62,3510.49 2016,3514.3 2021.76,3517.48 2027.85,3520 2034.17,3521.83 2040.67,3522.93 2046.67,3523.27

## Keep-outs
Keep-Out Layer:
  the board outline again, w3.94

## Other copper
Top Layer:
  text "V1.1" at 4070,2125 h118.11
  text "EVAL-AD7124" at 3590,2010 h118.11
  text "TOP LAYER" at 2362.2,1771.65 h118.11
Bottom Layer:
  text "BOTTOM LAYER" at 2362.2,1771.65 h118.11
PWR Layer (plane layer: these items are gaps in the copper):
  lines w39.37: 3375,2875 3375,2955 3560,3140 ; 3375,2950 3375,2690 3435,2630 ; 3435,1975 3435,2630 ; 3435,2590 3435,2630 ; 3560,3160 3560,3175 3560,3543.31 ; 3560,3195 3560,3135 3560,3365 ; 3980,3245 3980,3075 4170,2885 4315,2885 ; 3980,3255 4100,3255 4200,3355 4325,3355
  text "PWR LAYER" at 2362.2,1771.65 h118.11
GND Layer (plane layer: these items are gaps in the copper):
  lines w39.37: 3435,1975 3435,2630 ; 3435,2525 3435,2625 3430,2630 3430,2635 3375,2690 3375,2955 3560,3140 3560,3545
  text "GND LAYER" at 2362.2,1771.65 h118.11

## Silkscreen, mask and mechanical layers (free items; w line width, h text height)
Top Overlay:
  text "TOP OVERLAYER" at 2362.2,1771.65 h118.11
Bottom Overlay:
  text "AIN0" at 2090,3170 h59.06
  text "AIN1" at 2372.86,3169.37 h59.06
  text "AIN2" at 2090,3070 h59.06
  text "AIN3" at 2380,3070 h59.06
  text "AIN4" at 2090,2970 h59.06
  text "AIN5" at 2380,2970 h59.06
  text "3.3V" at 4000,2895 h59.06
  text "V5.0" at 4324.94,2895 h59.06
  text "AIN6" at 2090,2870 h59.06
  text "AIN7" at 2380,2870 h59.06
  text "CS" at 4325,2795 h59.06
  text "GND" at 4000,2790 h59.06
  text "GND" at 2090,2770 h59.06
  text "GND" at 2380,2770 h59.06
  text "GND" at 4325,2695 h59.06
  text "SCK" at 4005,2685 h59.06
  text "R+" at 2045,2675 h59.06
  text "R-" at 2380,2670 h59.06
  text "GND" at 4010,2595 h59.06
  text "MOSI" at 4325,2595 h59.06
  text "AIN8" at 2090,2570 h59.06
  text "AIN9" at 2380,2570 h59.06
  text "SYNC" at 4010,2495 h59.06
  text "MISO" at 4325,2495 h59.06
  text "AI10" at 2090,2470 h59.06
  text "AI11" at 2380,2470 h59.06
  text "AI12" at 2090,2370 h59.06
  text "AI13" at 2380,2370 h59.06
  text "AI14" at 2090,2270 h59.06
  text "AI15" at 2371.65,2270 h59.06
  text "BOTTOM OVERLAYER" at 2362.2,1771.65 h118.11
Mechanical 1:
  lines w10: 1751.65,2028.5 1771.65,1968.5 ; 1751.65,3483.31 1771.65,3543.31 ; 1761.65,1968.5 1781.65,1968.5 ; 1761.65,3543.31 1781.65,3543.31 ; 1771.65,2573.3 1771.65,1968.5 ; 1771.65,2938.51 1771.65,3543.31 ; 1791.65,2028.5 1771.65,1968.5 ; 1791.65,3483.31 1771.65,3543.31 ; 1968.5,3730.16 1968.5,3750.16 ; 2028.5,3720.16 1968.5,3740.16 ; 2028.5,3760.16 1968.5,3740.16 ; 2965.56,3740.16 1968.5,3740.16 ; 3333.65,3740.16 4330.71,3740.16 ; 4270.71,3720.16 4330.71,3740.16 ; 4270.71,3760.16 4330.71,3740.16 ; 4330.71,3730.16 4330.71,3750.16
  text "2362.205 (mil)" at 2975.56,3714.96 h60
  text "1574.803 (mil)" at 1796.85,2583.3 h60 r90
  text "layer 1:top layer" at 2362.2,1574.8 h118.11
  text "layer 2:GND layer" at 2362.2,1377.95 h118.11
  text "layer 3:PWR layer" at 2362.2,1181.1 h118.11
  text "layer 4:bottom layer" at 2362.2,984.25 h118.11